# Altium PCB LEO_COTS_amps_tripler_rev1.PcbDoc
Units mil, origin at the board's own origin, x right, y up, seen from the top; angles counter-clockwise.
Board outline 1574.8 x 393.7 mil, 2 copper layers (Top Layer, Bottom Layer), stack 14.8 mil thick; 15 components, 10 nets, 55 pads, 22 vias.
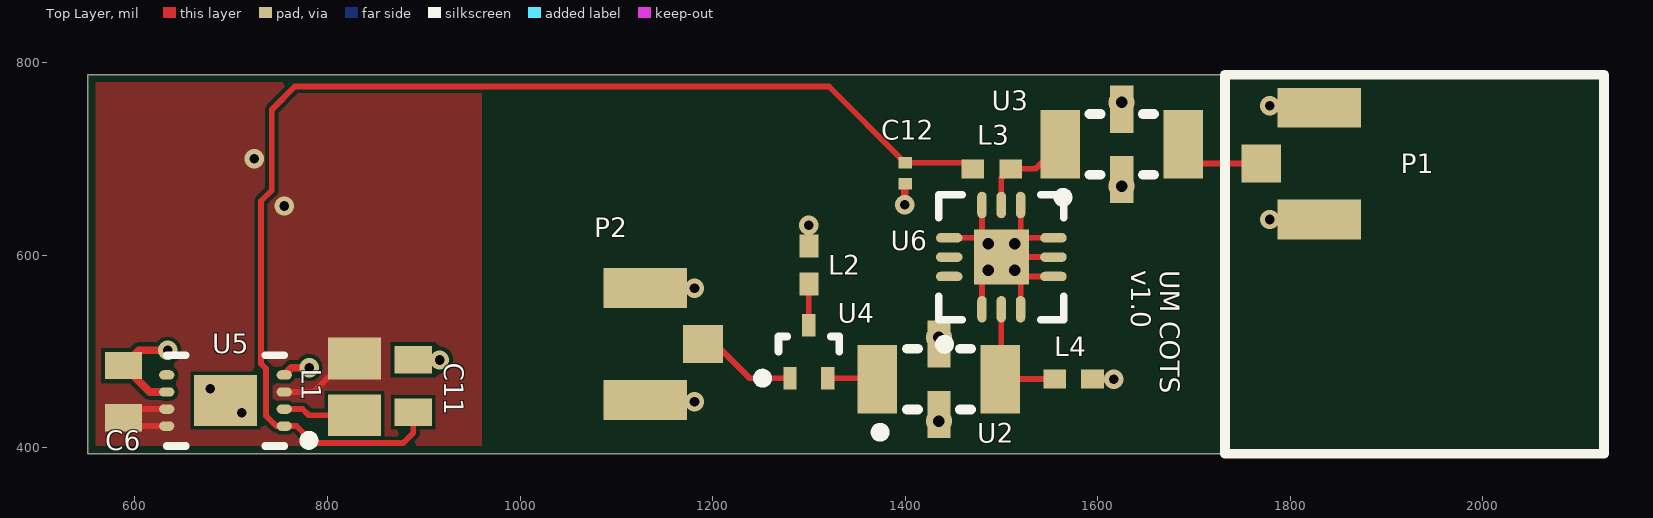
[diagram p0: Top Layer view]
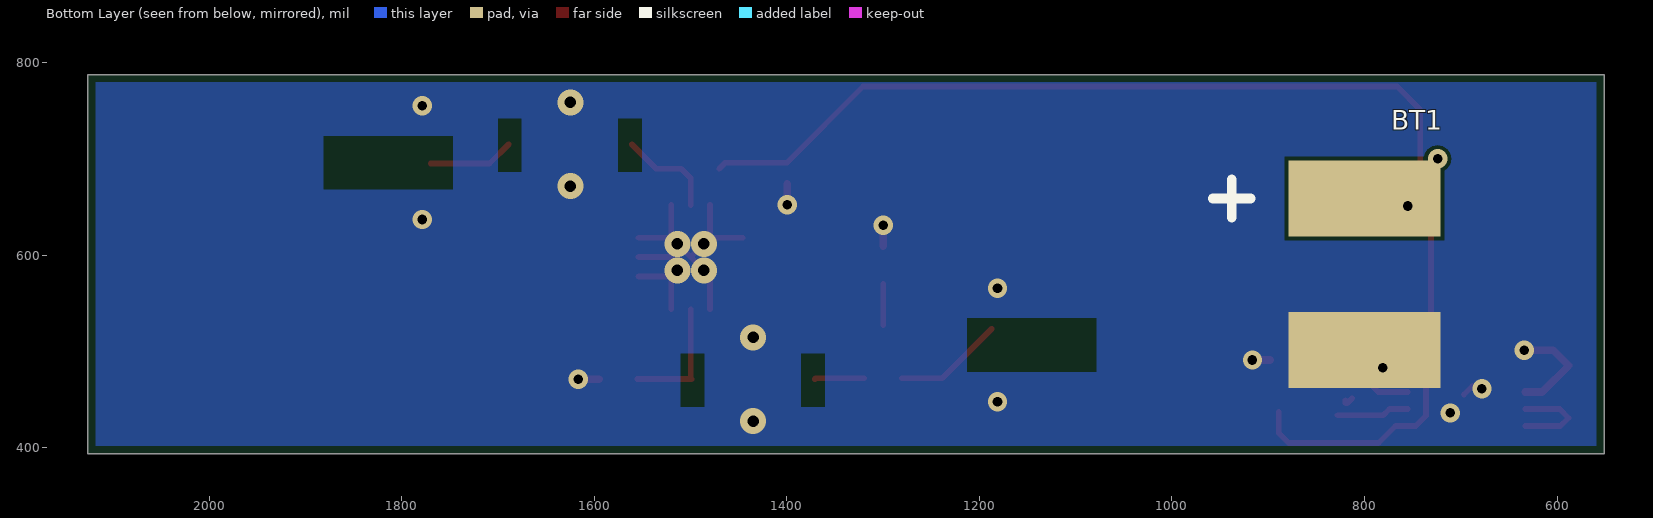
[diagram p1: Bottom Layer view, seen from below]

## Layer stack, top to bottom
Top Solder: solder mask 0.4, Solder Resist, Dk 3.5
Top Layer: signal copper 1.4
Dielectric 1: core 12, RO4003C-012, Dk 3.55
Bottom Layer: signal copper 1.4
Bottom Solder: solder mask 0.4, Solder Resist, Dk 3.5

## Board outline
551.18,393.7 2125.98,393.7 2125.98,787.4 551.18,787.4

## Design rules (kind name [scope] priority, off if disabled: settings)
BoardOutlineClearance BoardOutlineClearance_1 [All] p1: gap=8 ignorepadtopadclearanceinfootprint=FALSE
Clearance [All] p1: gap=4 ignorepadtopadclearanceinfootprint=FALSE
HoleSize [All] p1: absolutevalues=TRUE maxlimit=100 minlimit=8 maxpercent=80.000 minpercent=20.000
MinimumAnnularRing [All] p1: minimumring=5
MinimumSolderMaskSliver [All] p1 off: minsoldermaskwidth=10
PlaneConnect [All] p1: planeconnectstyle=Direct reliefexpansion=20 reliefentries=4 reliefconductorwidth=10 reliefairgap=10
PolygonConnect [All] p1: connectstyle=Direct reliefconductorwidth=10 reliefentries=4 polygonreliefangle="90 Angle" airgapwidth=10
RoutingVias [All] p1: holewidth=10 width=20 viastyle="Through Hole" minholewidth=8 minwidth=16 maxholewidth=90 maxwidth=100
SilkToSilkClearance [All] p1 off: silktosilkclearance=10
SilkToSolderMaskClearance [IsPad] p1 off: minsilkscreentomaskgap=10 clearancetoexposedcopper=TRUE
SolderMaskExpansion [All] p1: expansion=4
Width [All] p1: maxlimit=100 minlimit=4 preferedwidth=4
25 further rules are at their usual default settings.

## Components (designator, comment, footprint, x,y, rotation, side; value= is the part's Value field where it differs from the comment)
BT1 "BATT_LIPO" LIPO_1cm_1cm 800,580 r0 bottom
C6 "CAP_0603" CAPC1608X05N 588,458 r270 top value=3.3uF
C11 "CAP_0603" CAPC1608X05N 889,464 r270 top value=3.3uF
C12 "CAP_0201" CAPC0603X04N 1400,685 r90 top value=100nF
L1 "Inductor" C0805 828,463 r270 top value=4.7uH
L2 "Inductor" 0402 1300,589.61 r90 top value=220nH
L3 "Inductor" 0402 1490,689.58 r0 top value=39nH
L4 "Inductor" 0402 1575,471.34 r0 top value=39nH
P1 "1909763-1" 1909763-1 1830,695 r270 top
P2 "1909763-1" 1909763-1 1130,507.54 r90 top
U2 "BFCN-3085+" FV1206 1435,471.02 r0 top
U3 "BFCN-3085+" FV1206 1625,715 r0 top
U4 "SDMP0340LCT" SOT-523 1300,499.61 r90 top
U5 "LTC3529" 8-DFN 694.02,448.86 r180 top
U6 "PMA3-83LN+" DQ1225 1499.92,597.83 r90 top

## Footprints (in the part's own frame and the unit in brackets; to place one, negate y for a bottom-side part, rotate by r counter-clockwise, add the part's x,y. Pads: shape width x height; smd on the part's side, far side on the other; paste and mask are expansions set on the pad)
8-DFN [mm]
  oval 0.4x0.25 smd: 1(-1.55,0.675) 2(-1.55,0.225) 3(-1.55,-0.225) 4(-1.55,-0.675) 5(1.55,-0.675) 6(1.55,-0.225) 7(1.55,0.225) 8(1.55,0.675)
  rect 1.65x1.35 smd: 9(0,0)
  silkscreen extent -2.33,-1.2 1.55,1.2, body extent -1.55,-1.05 1.55,1.05, height 0.8
0402 [mm] "Chip Capacitor, Body 1.0x0.5mm, IPC High Density"
  rect 0.6x0.5 smd: 1(-0.5,0) 2(0.5,0)
  body extent -0.55,-0.3 0.55,0.3, height 1.3
1909763-1 [mm]
  rect 1x1.05 smd: 1(0,-1.525)
  rect 1.05x2.2 smd: 2(-1.475,0) 2(1.475,0)
  body extent -1.5,-1.55 1.5,1.55, height 1.22
C0805 [mm] "Chip Capacitor, Body 2.0x1.3mm, IPC High Density"
  rect 1.1x1.4 smd: 1(-0.75,0) 2(0.75,0)
  body extent -1.1,-0.72 1.1,0.72, height 1.4
CAPC0603X04N [mm] "Chip Capacitor, 2-Leads, Body 0.60x0.30mm, IPC Medium Density"
  rect 0.3x0.35 smd: 1(-0.275,0) 2(0.275,0)
  body extent -0.32,-0.17 0.32,0.17, height 0.35
CAPC1608X05N [mm] "Chip Capacitor, 2-Leads, Body 1.55x0.85mm, IPC Medium Density"
  rect 0.72x0.98 smd: 1(-0.69,0) 2(0.69,0)
  body extent -0.8,-0.45 0.8,0.45, height 0.5
DQ1225 [mm]
  oval 0.7x0.25 smd: 1(-1.375,0.51) 2(-1.375,0) 3(-1.375,-0.51) 7(1.375,-0.51) 8(1.375,0) 9(1.375,0.51)
  oval 0.25x0.7 smd: 4(-0.51,-1.375) 5(0,-1.375) 6(0.51,-1.375) 10(0.51,1.375) 11(0,1.375) 12(-0.51,1.375)
  rect 1.45x1.45 smd: 13(0,0)
  silkscreen extent -2.42,-1.65 1.65,1.65, body extent -1.5,-1.5 1.5,1.5, height 0.89
FV1206 [mm]
  rect 1.04x1.8 smd: 1(-1.625,0) 3(1.625,0)
  rect 0.61x1.245 smd: 2(0,-0.927) 4(0,0.927)
  silkscreen extent -1.67,-1.52 0.85,0.8, body extent -1.6,-0.8 1.6,0.8, height 0.94
LIPO_1cm_1cm [mm]
  rect 4x2 smd: 1(0,-2) 2(0,2)
  silkscreen extent 3,-2.5 4,-1.5
SOT-523 [mm]
  rect 0.6x0.35 smd: 1(-0.7,0.5) 2(-0.7,-0.5) 3(0.7,0)
  silkscreen extent -0.82,-0.8 0.4,1.35, body extent -0.4,-0.8 0.4,0.8, height 0.75

## Part data
C6 C11: "CAP CER 3.3uF 0603", Supplier Part Number 1=445-12446-1-ND, Supplier 1=Digi-Key
C12: "CAP CER 100nF 0201"
L1: Supplier Part Number 1=535-12790-1-ND, Code_IEC=1005, Code_JEITA=0402, LatestRevisionDate=29-May-2009, LatestRevisionNote="IPC-7351 Footprint Added.", PackageDescription="Chip Inductor", PackageReference=0402-A, Published=8-Jun-2000, Publisher="Altium Limited", Supplier 1=Digi-Key
L2: Supplier Part Number 1=0402FL-221XJR_, Code_IEC=1005, Code_JEITA=0402, LatestRevisionDate=29-May-2009, LatestRevisionNote="IPC-7351 Footprint Added.", PackageDescription="Chip Inductor", PackageReference=0402-A, Published=8-Jun-2000, Publisher="Altium Limited", Supplier 1=Coilcraft
L3 L4: Supplier Part Number 1=490-1153-1-ND, Code_IEC=1005, Code_JEITA=0402, LatestRevisionDate=29-May-2009, LatestRevisionNote="IPC-7351 Footprint Added.", PackageDescription="Chip Inductor", PackageReference=0402-A, Published=8-Jun-2000, Publisher="Altium Limited", Supplier 1=Digi-Key
P1 P2: "CONN UMCC JACK STR 50OHM SMD", Supplier Part Number 1=A118077CT-ND, Manufacturer Part Number=1909763-1, Supplier 1=Digi-Key
U2 U3: "2800 to 3400 MHz Band-Pass Filter", Supplier 1=Mini-Circuits, Supplier Part Number 1=BFCN-3085+
U4: "Dual Common Cathode Schottky", Supplier Part Number 1=SDMP0340LCT-FDICT-ND, Supplier 1=Digi-Key
U5: "5V Boost Converter"
U6: "Wideband LNA", Supplier 1=Mini-Circuits, Supplier Part Number 1=PMA3-83LN+

## Via types
v1: diameter 20, hole 10, Top Layer to Bottom Layer, tented both sides, 12 vias
v2: diameter 27, hole 12, Top Layer to Bottom Layer, 4 vias
v3: diameter 27, hole 12, Top Layer to Bottom Layer, tented both sides, 4 vias
v4: diameter 20, hole 10, Top Layer to Bottom Layer, 2 vias

## Nets (pads, with @x,y where several pads share a name; then routed paths per layer and width w, separated by ;. In a path a pad name is that pad's centre, name@x,y a point inside that pad or via, vN(x,y) a via of type N, cw(c..) or ccw(c..) an arc to the next point about the centre after c; other vN are vias at no path point)
GND: BT1.2 C6.1 C11.1 C12.1 L2.2 L4.2 P1.2 P2.2 U2.2 U2.4 U3.2 U3.4 U5.4 U5.6 U5.9 U6.1 U6.3 U6.4 U6.5 U6.6 U6.7 U6.9 U6.10 U6.13 | length 607
  Top Layer w6: U5.9@687.68,464.06 U5.9@696.54,455.2 ; U6.10 U6.13@1479.84,617.91 ; U6.1 1479.84,577.76 v3(1486.14,584.06) U6.13 ; U6.9 U6.13@1479.84,617.91 ; v3(1513.7,584.06) U6.13@1520,577.76 ; U6.13@1513.7,597.83 U6.5 ; U6.3 U6.13@1520,577.76 ; U6.7 U6.13@1520,617.91 ; U6.4 U6.13@1520,577.76 ; U6.6 U6.13@1520,617.91 ; U6.13@1479.84,617.91 v3(1486.14,611.61) U6.13 ; U6.13 v3(1513.7,611.61) U6.13@1520,617.91
  Top Layer w8: U5.6 615.45,457.72 C6.1 603.83,501 v1(634,501) ; U5.4 762.61,483 v1(781,483) ; C11.1@898,491 v1(916.39,491) ; L2.2 v1(1300,631.03) ; v1(1399.74,652.17) C12.1@1399.74,673.91 ; L4.2@1594.94,471.08 v1(1616.69,471.08)
  other v1: 1181.19,447.49 1181.19,565.6 1778.81,636.94 1778.81,755.05
  other v2: 1435,427.52 1435,514.53 1625,671.5 1625,758.5
  other v4: 711,436 678,461
NetL1_2: L1.2 U5.2 | length 86.3
  Top Layer w6: U5.2 774,440 780.53,433.47 L1.2 ; L1.2@812.76,451.24 L1.2@818,446 ; L1.2@819.76,446 L1.2@819.76,449.24
NetL2_1: L2.1 U4.3 | length 42.8
  Top Layer w6: U4.3 L2.1
NetL3_2: L3.2 U3.1 U6.8 | length 103.5
  Top Layer w6: U6.8 1499.92,679.82 L3.2 1535.61,689.58 U3.1
NetL4_1: L4.1 U2.3 U6.2 | length 129.1
  Top Layer w6: U2.3 U2.3@1499.29,471.34 ; U6.2 1499.92,471.97 U2.3@1499.29,471.34 ; L4.1 U2.3@1499.29,471.34
NetP1_1: P1.1 U3.3 | length 89.3
  Top Layer w6: U3.3 1708.98,695 P1.1
NetP2_1: P2.1 U4.1 | length 114.5
  Top Layer w6: P2.1@1187.13,523.5 1238.58,472.05 U4.1
NetU2_1: U2.1 U4.2 | length 51.8
  Top Layer w6: U4.2 1370,472.05 U2.1
V5P0: C11.2 C12.2 L3.1 U5.1 | length 1289.1
  Top Layer w6: C11.2 889,415 878.7,404.7 785.3,404.7 767.72,422.28 U5.1 746.72,422.28 736,433 736,482 731,487 731,656 742,667 742,751 766,775 1320.83,775 C12.2 1464.07,695.83 L3.1
VDDS: BT1.1 C6.2 L1.1 U5.3 U5.7 U5.8 | length 184.7
  Top Layer w6: U5.8 596.55,422.28 C6.2 597.17,440 U5.7 ; U5.3 785.72,457.72 820.53,492.53 L1.1
  other v1: 755,651 724,700
pads on no net: U5.5 U6.11 U6.12

## Polygon pours and split planes (outlines as drawn)
GND on Bottom Layer "Bottom Layer-GND" (solid, pour order 2): 2125.98,393.58 2125.98,786.84 551.18,787.45 551.18,394.04
VDDS on Top Layer "Top Layer-VDDS" (solid, pour order 6): 960,787.4 551.18,787.4 551.18,394 960,394

## Other copper
Bottom Layer:
  pour cut-out: 1575,686.42 1575,741.54 1550.71,741.54 1550.71,686.42
  pour cut-out: 1675.71,741.54 1675.71,686.42 1700,686.42 1700,741.54
  pour cut-out: 1385,442.44 1385,497.56 1360.71,497.56 1360.71,442.44
  pour cut-out: 1485.71,497.56 1485.71,442.44 1510,442.44 1510,497.56
  pour cut-out: 1212.68,478.99 1212.68,534.11 1078.83,534.11 1078.83,478.99
  pour cut-out: 1747.32,723.55 1747.32,668.43 1881.17,668.43 1881.17,723.55

## Silkscreen, mask and mechanical layers (free items; w line width, h text height)
Top Overlay:
  lines w10: 1732.28,393.7 1732.28,787.4 2125.98,787.4 2125.98,393.7 1732.28,393.7
  text "UM COTS  / v1.0" at 1635,584 h20 r270
Mechanical 5 (Mech5):
  the board outline again, w1